# Altium PCB PCB1.PcbDoc
Units mil, origin at the board's own origin, x right, y up, seen from the top; angles counter-clockwise.
Board outline 1972 x 3254.5 mil, 2 copper layers (Top Layer, Bottom Layer); 11 components, 9 nets, 56 pads, 0 vias.
Unrouted connection lines stored in the file: 1.
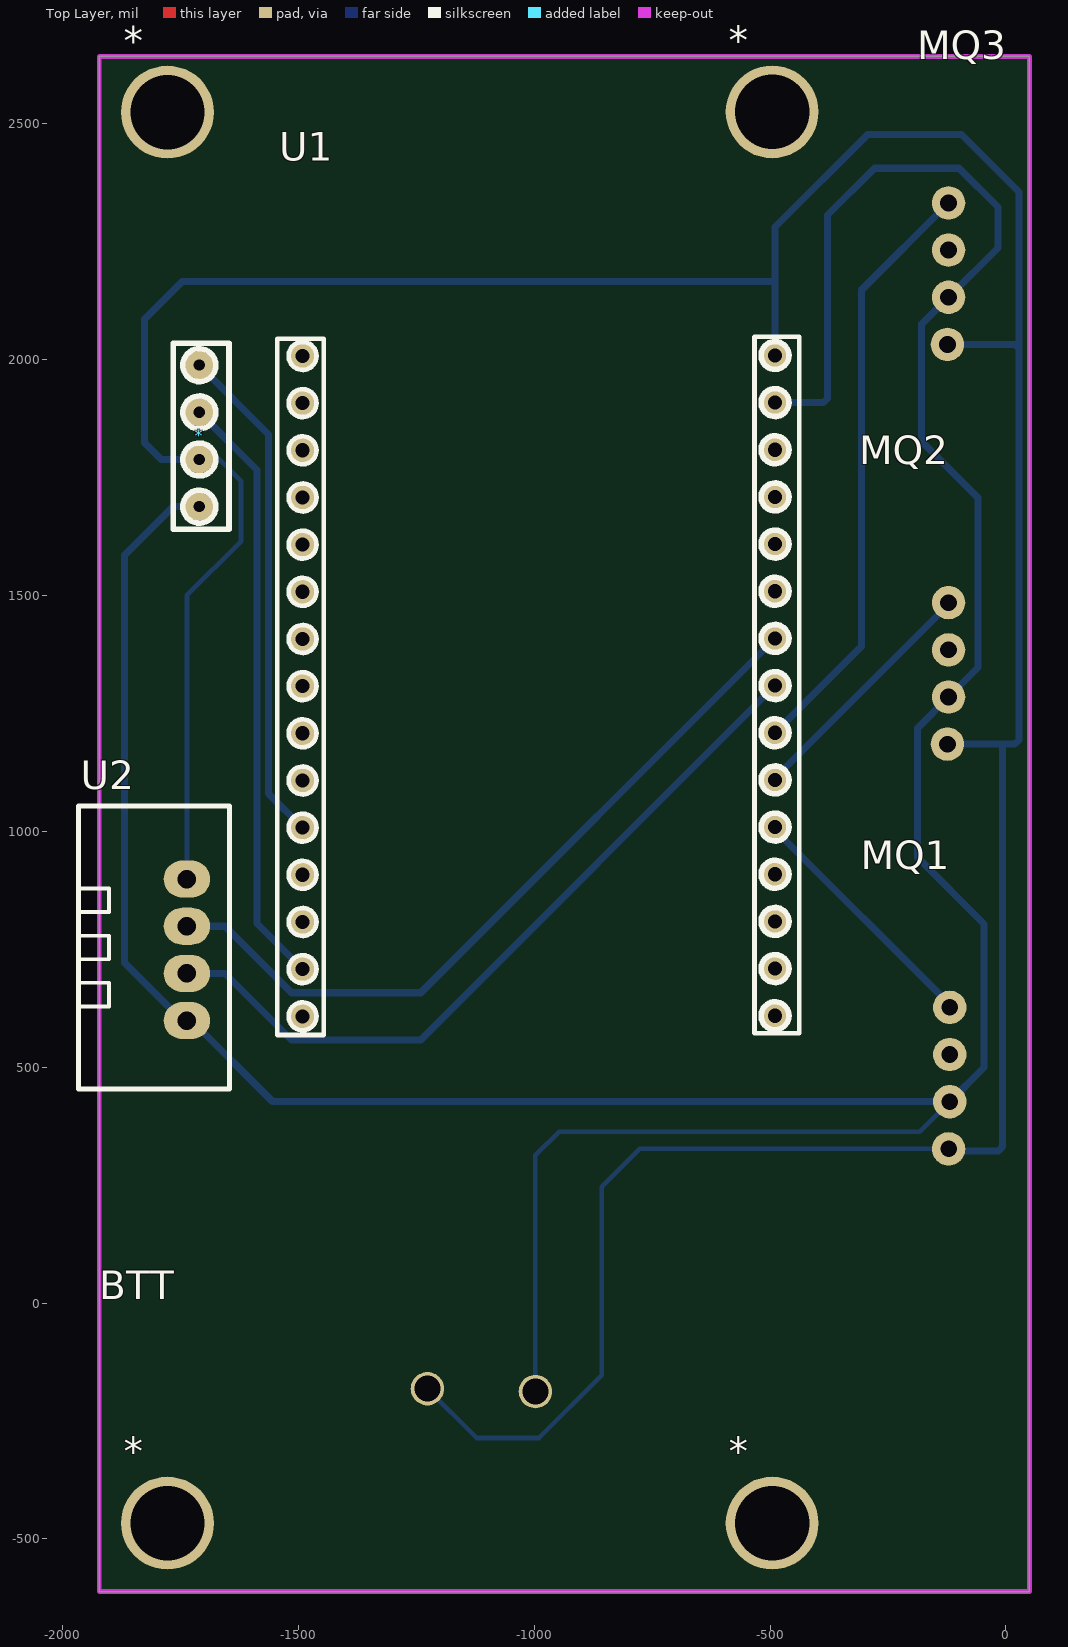
[diagram p0: Top Layer view]
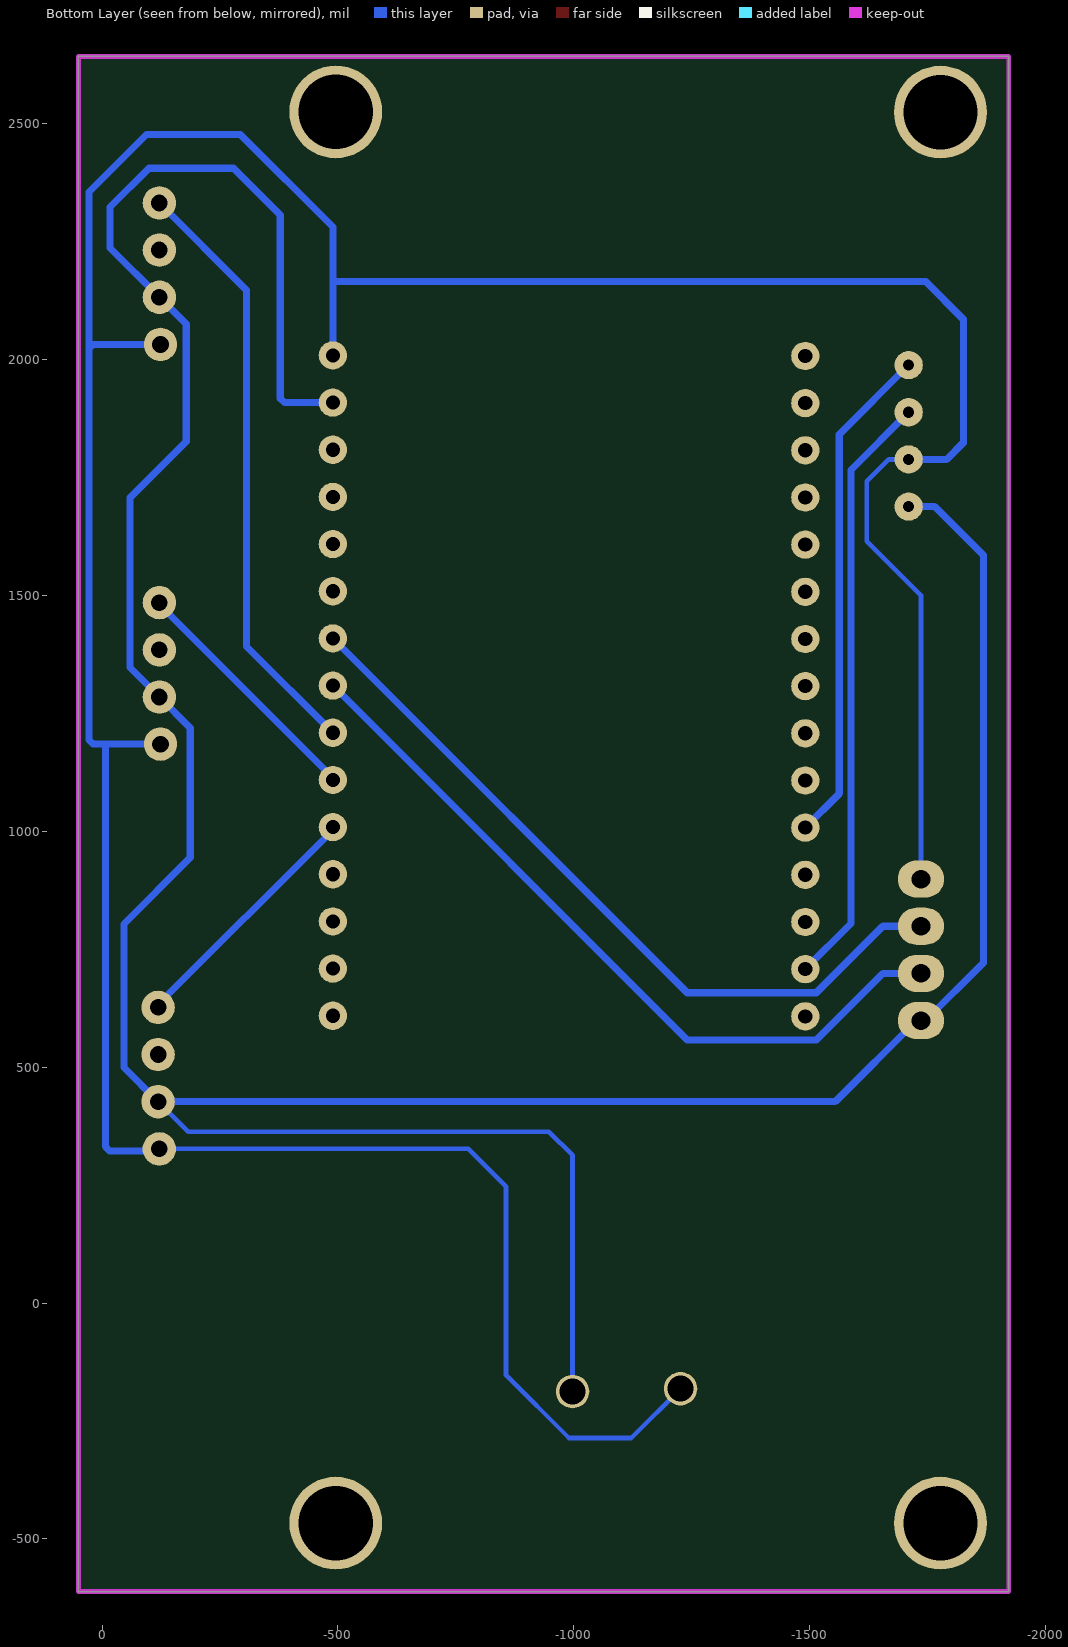
[diagram p1: Bottom Layer view, seen from below]

## Layer stack, top to bottom
Top Solder: solder mask 0.4, Solder Resist, Dk 3.5
Top Layer: signal copper 1.4
Dielectric 1: dielectric 12.6, FR-4, Dk 4.8
Bottom Layer: signal copper 1.4
Bottom Solder: solder mask 0.4, Solder Resist, Dk 3.5

## Board outline
-1922,-611.5 -1922,2643 50,2643 50,-611.5

## Design rules (kind name [scope] priority, off if disabled: settings)
Clearance [All] p1: gap=10 ignorepadtopadclearanceinfootprint=FALSE except(0: Arc-Hole Track-Hole SMDPad-Hole THPad-Hole Via-Hole Fill-Hole Poly-Hole Region-Hole Text-Hole)
ComponentClearance [All] p1: gap=10 collisioncheckmode=3 verticalgap=30 showdistances=FALSE
Height [All] p1: minheight=0 maxheight=3000 prefheight=500
PolygonConnect [All] p1: connectstyle=Relief reliefconductorwidth=10 reliefentries=4 polygonreliefangle="90 Angle" airgapwidth=10
RoomDefinition Sheet1 [InComponentClass('Sheet1')] p1: confinementstyle=ConfineIn formatcopy=TRUE lockcomponents=FALSE outline -5170,-1947 -3170,-1947 -3170,-947 -5170,-947
RoutingVias [All] p1: holewidth=28 width=50 viastyle="Through Hole" minholewidth=28 minwidth=50 maxholewidth=28 maxwidth=50
SolderMaskExpansion [All] p1: expansion=4 istentingtop=FALSE
Width [All] p1: maxlimit=30 minlimit=10 preferedwidth=20
28 further rules are at their usual default settings.

## Classes and differential pairs
component class Sheet1: * BTT MQ1 MQ2 MQ3 U1 U2

## Components (designator, comment, footprint, x,y, rotation, side; value= is the part's Value field where it differs from the comment)
* "VIT" VIT -1777.5,-466.5 r0 top
* "VIT" VIT -1777.5,2525 r0 top
* "VIT" VIT -495.5,-466.5 r0 top
* "VIT" VIT -495.5,2525.5 r0 top
* "Module SSD1306" "Module SSD1306" -2592,1739.5 r180 top
BTT "Battery" Battery -1013.5,-211.5 r90 top
MQ1 "MQ135" MQ135 -121.36,327 r180 top
MQ2 "MQ135" MQ135 -123.86,1185 r180 top
MQ3 "MQ135" MQ135 -123.86,2032.5 r180 top
U1 "ESP32_Module" ESP32_Module -489.43,609.18 r180 top
U2 "DHT22" DHT22_180 -1806.21,754 r180 top

## Footprints (in the part's own frame and the unit in brackets; to place one, negate y for a bottom-side part, rotate by r counter-clockwise, add the part's x,y. Pads: shape width x height; smd on the part's side, far side on the other; paste and mask are expansions set on the pad)
Battery [mm]
  round 1.8 hole 1.4: 1(0.762,5.41) 2(0.61,-0.406)
  body extent -15.49,-38.17 4.81,23.33, height 83.9
DHT22_180 [mm]
  oval 2.5x2 hole 1: 1(-1.778,-3.683) 2(-1.778,-1.143) 3(-1.778,1.397) 4(-1.778,3.937)
  silkscreen extent -4.06,-7.62 4.06,7.62, body extent -4.06,-7.74 4.09,7.74, height 25.27
ESP32_Module [mil]
  round 60 hole 30: 1(0,0) 2(0,-100) 3(0,-200) 4(0,-300) 5(0,-400) 6(0,-500) 7(0,-600) 8(0,-700) 9(0,-800) 10(0,-900) 11(0,-1000) 12(0,-1100) 13(0,-1200) 14(0,-1300) 15(0,-1400) 16(1001.57,1.18) 17(1001.57,-98.82) 18(1001.57,-198.82) 19(1001.57,-298.82) 20(1001.57,-398.82) 21(1001.57,-498.82) 22(1001.57,-598.82) 23(1001.57,-698.82) 24(1001.57,-798.82) 25(1001.57,-898.82) 26(1001.57,-998.82) 27(1001.57,-1098.82) 28(1001.57,-1198.82) 29(1001.57,-1298.82) 30(1001.57,-1398.82)
  silkscreen extent -51,-1439 1055,41, body extent -51,-1782 1057,246, height 570
"Module SSD1306" [mm]
  round 1.524 hole 0.6: 1(-22.4,1.29) 2(-22.4,-1.25) 3(-22.4,-3.79) 4(-22.4,-6.33)
  silkscreen extent -24,-7.5 -21,2.5, body extent -23.86,-16.74 3.54,11.66, height 10.5
MQ135 [mm]
  round 1.8 hole 0.9: 1(0,0) 2(-0.06,-2.54) 3(-0.06,-5.08) 4(-0.06,-7.62)
  body extent -18,-14.3 5,6.7, height 39.86
VIT [mm]
  round 5 hole 4: 5(0,0)

## Part data
U2: "SENSOR HUMIDITY/TEMPERATURE", Digikey PN=1528-1228-ND

## Nets (pads, with @x,y where several pads share a name; then routed paths per layer and width w, separated by ;. In a path a pad name is that pad's centre, name@x,y a point inside that pad or via, vN(x,y) a via of type N, cw(c..) or ccw(c..) an arc to the next point about the centre after c; other vN are vias at no path point)
+5: *.2 BTT.1 MQ1.1 MQ2.1 MQ3.1 U1.15 U2.1 | length 7762.7
  Bottom Layer w10: U2.1 -1736.21,1500.79 -1621.5,1615.5 -1621.5,1742.5 -1667.71,1788.71 *.2 ; BTT.1 -1122,-286 -990,-286 -856.5,-152.5 -856.5,246.5 -776,327 MQ1.1
  Bottom Layer w15: *.2 -1790.71,1788.71 -1825.99,1823.99 -1825.99,2086.01 -1746.5,2165.5 -489.43,2165.5 ; U1.15 -489.43,2165.5 ; MQ2.1 -6.99,1185 ; MQ3.1 18.71,2032.5 27.5,2023.71 ; MQ1.1 -117.18,322.82 -15.78,322.82 -6.99,331.61 -6.99,1185 ; -489.43,2165.5 -489.43,2281.07 -293,2477.5 -94,2477.5 27.5,2356 27.5,2023.71 ; -6.99,1185 -6.5,1185 18.71,1185 27.5,1193.79 27.5,2023.71
GND: *.1 BTT.2 MQ1.2 MQ2.2 MQ3.2 U1.14 U1.29 U2.4 | length 7457.2
  Bottom Layer w10: BTT.2 -997.5,313 -946.98,363.51 -182.49,363.51 MQ1.2
  Bottom Layer w15: *.1 -1765.29,1688.71 -1868.5,1585.5 -1868.5,721.44 -1746.06,599 U2.4 -1726.37,599 -1554.37,427 MQ1.2 -46.33,499.67 -46.33,803.83 -187,944.5 -187,1219.5 MQ2.2 -59,1347.5 -59,1707.5 -178.5,1827 -178.5,2075.5 MQ3.2 -17,2237 -17,2323.5 -99.5,2406 -278.5,2406 -377.82,2306.68 -377.82,1917.97 -386.61,1909.18 U1.14
NC: U1.8 U2.3 | length 1616.3
  Bottom Layer w15: U2.3 -1655.26,699 -1514.26,558 -1240.61,558 U1.8
Net*_3: *.3 U1.17 | length 1271.5
  Bottom Layer w15: *.3 -1588,1766.6 -1588,805 U1.17
Net*_4: *.4 U1.20 | length 1071.5
  Bottom Layer w15: *.4 -1563,1841.6 -1563,1080 U1.20
NetMQ1_4: MQ1.4 U1.5 | length 535.6
  Bottom Layer w15: U1.5 -489.43,1003.3 -119,632.88 MQ1.4
NetMQ2_4: MQ2.4 U1.6 | length 528.2
  Bottom Layer w15: U1.6 -489.43,1113.13 -121.5,1481.05 MQ2.4
NetMQ3_4: MQ3.4 U1.7 | length 1275.7
  Bottom Layer w15: U1.7 -306.5,1392.1 -306.5,2147.5 MQ3.4
SIG: U1.9 U2.2 | length 1616.3
  Bottom Layer w15: U2.2 -1655.26,799 -1514.26,658 -1240.61,658 U1.9
pads on no net: *.5 MQ1.3 MQ2.3 MQ3.3 U1.1 U1.2 U1.3 U1.4 U1.10 U1.11 U1.12 U1.13 U1.16 U1.18 U1.19 U1.21 U1.22 U1.23 U1.24 U1.25 U1.26 U1.27 U1.28 U1.30

## Keep-outs
Keep-Out Layer:
  the board outline again, w10